# EAGLE board posboard (EAGLE 7.1.0)
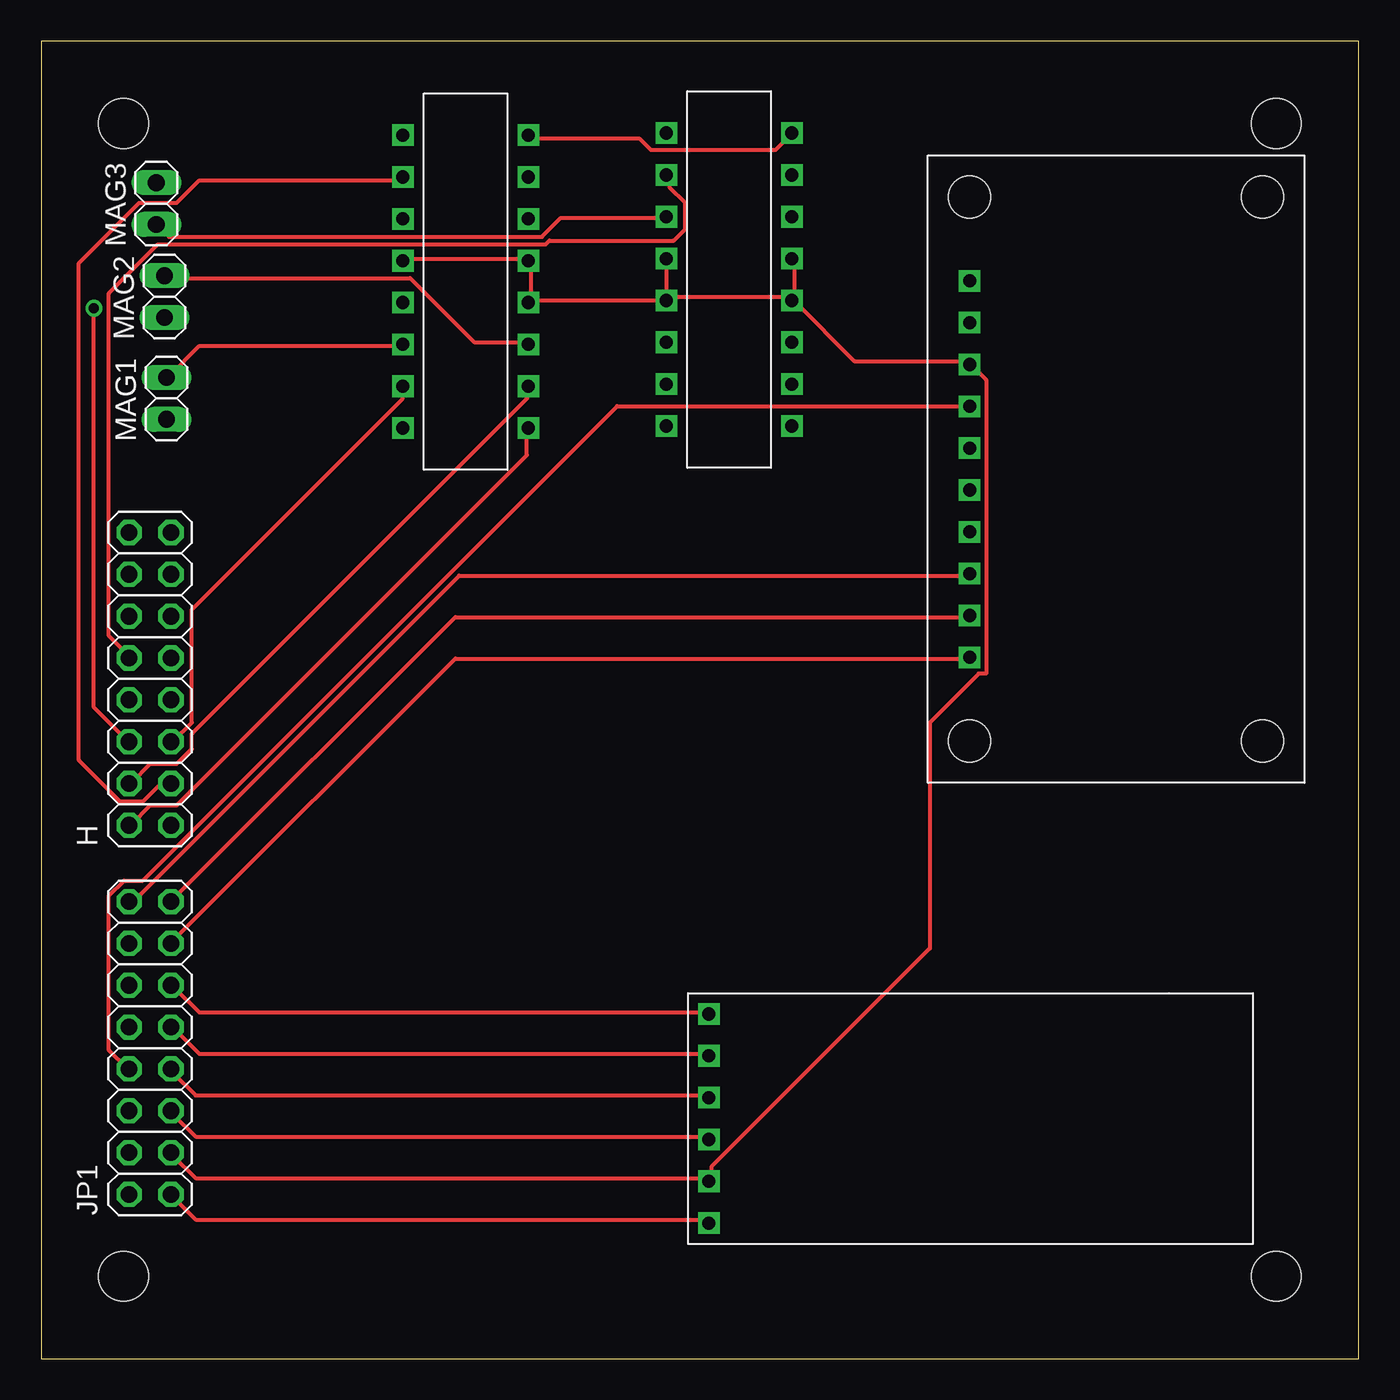
[diagram p0: board, top side]
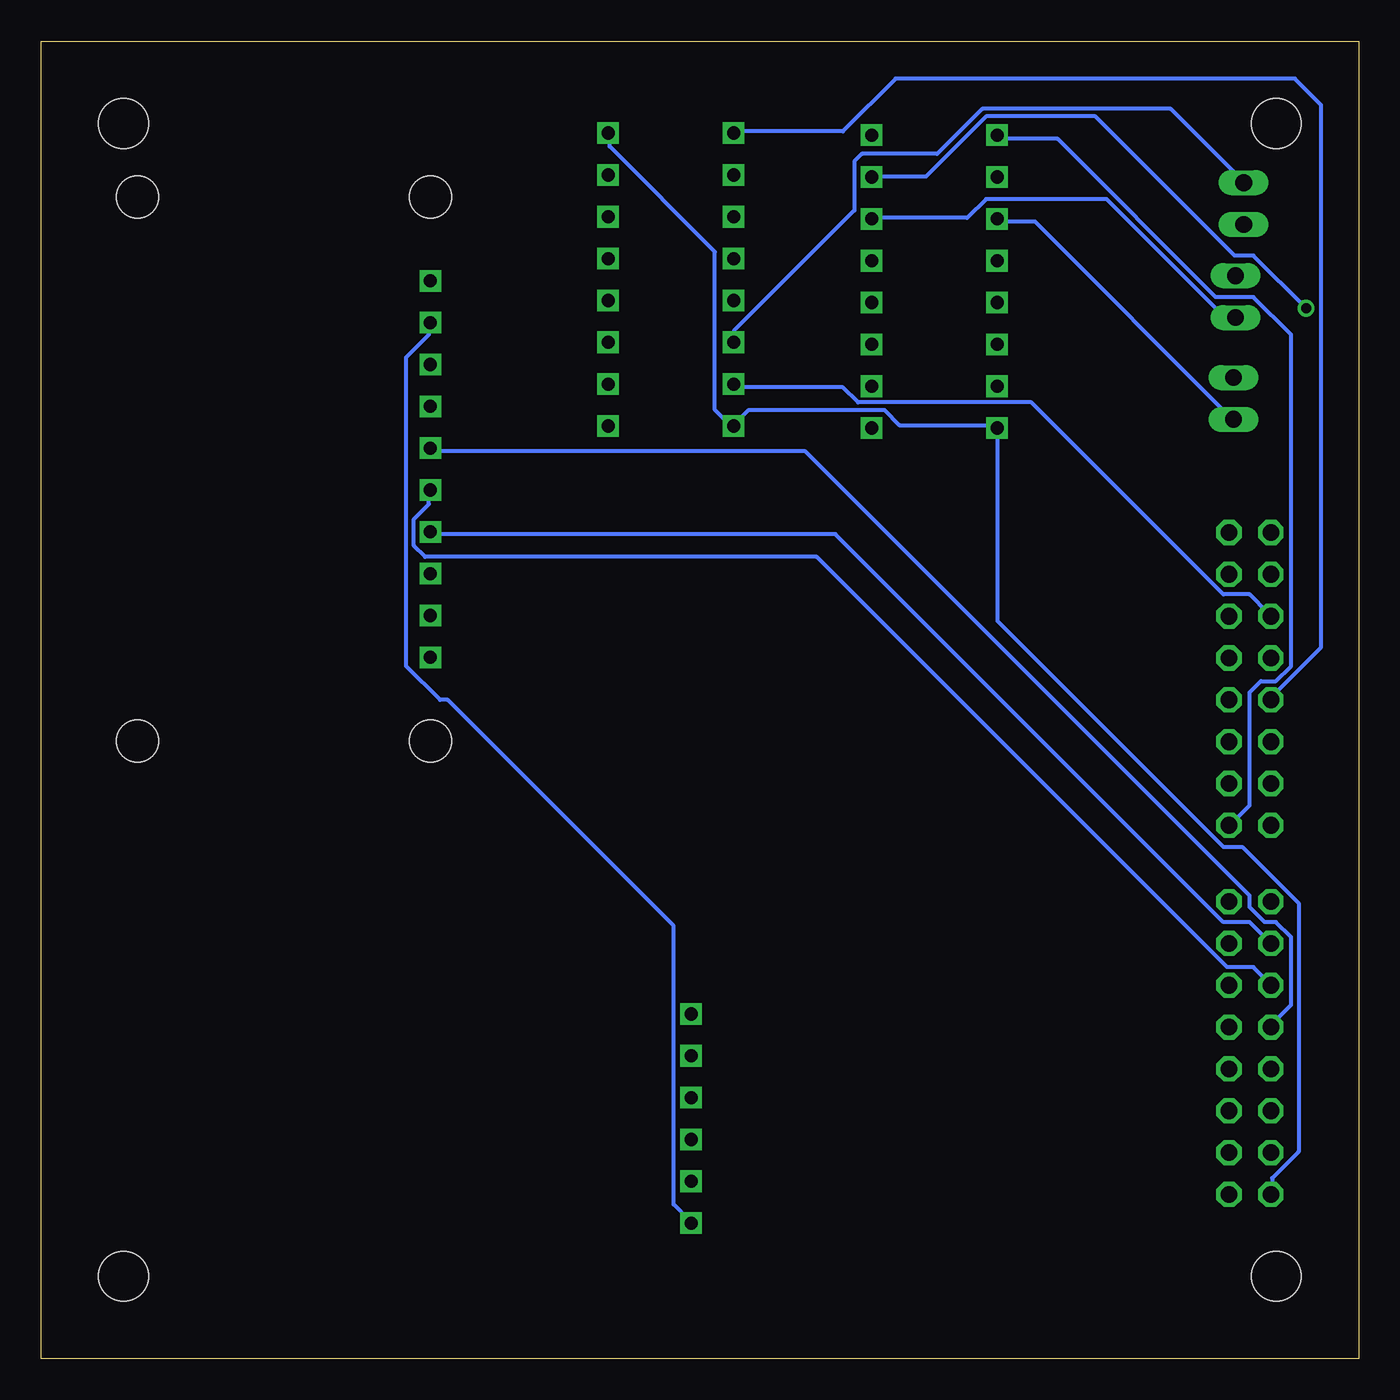
[diagram p1: board, bottom side, seen from below]

Size 80 x 80 mm. Coordinates in mm from the lower left corner, seen from the top.
Outline: 0,0 80,0 80,80 0,80 0,0
Copper layers (1*16): Top 0.035mm / dielectric 1.5mm / Bottom 0.035mm
Design rules "default": minimum track width 10mil, minimum drill 24mil, track to track 8mil, track to pad 8mil, pad to pad 8mil, via to via 8mil, smd to smd 8mil, copper to edge 40mil, drill to drill 8mil, minimum pad ring 10mil, minimum via ring 8mil, stop-mask expansion 4mil, vias tented up to drill 0mil, thermal gap 10mil
Holes 3 mm at 5,75 75,75 75,5 5,5

## Footprints (pad centres in the part's own frame; a part is rotated, then mirrored left to right if it is on the bottom)
2X08 = drill 1.016 octagon: 1 -8.89,-1.27; 2 -8.89,1.27; 3 -6.35,-1.27; 4 -6.35,1.27; 5 -3.81,-1.27; 6 -3.81,1.27; 7 -1.27,-1.27; 8 -1.27,1.27; 9 1.27,-1.27; 10 1.27,1.27; 11 3.81,-1.27; 12 3.81,1.27; 13 6.35,-1.27; 14 6.35,1.27; 15 8.89,-1.27; 16 8.89,1.27
1X02 = drill 1.016 long: 1 -1.27,0; 2 1.27,0
GPS = drill 0.8 square: 3.3V 15.24,1.27; GND 12.7,1.27; RX 10.16,1.27; SCL 5.08,1.27; SDA 2.54,1.27; TX 7.62,1.27
IMU = drill 0.8 square: 3V 10.16,2.54; 5V 7.62,2.54; GINT 20.32,2.54; GND 12.7,2.54; GRDY 22.86,2.54; LINT1 25.4,2.54; LINT2 27.94,2.54; LRDY 30.48,2.54; SCL 15.24,2.54; SDA 17.78,2.54 | hole 2.54: 2.54,2.54; 35.56,2.54; 2.54,20.32; 35.56,20.32
HBRIDGE = drill 0.8 square: 1A -3.81,-2.54; 1Y -1.27,-2.54; 2A 8.89,-2.54; 2Y 6.35,-2.54; 3A 8.89,5.08; 3Y 6.35,5.08; 4A -3.81,5.08; 4Y -1.27,5.08; 12EN -6.35,-2.54; 34EN 11.43,5.08; P$4 1.27,-2.54; P$5 3.81,-2.54; P$12 1.27,5.08; P$13 3.81,5.08; VCC1 -6.35,5.08; VCC2 11.43,-2.54

## Placement (x,y rotation side)
H  [2X08]  6.61,41.28 90 top
JP1  [2X08]  6.61,18.87 90 top
MAG1  [1X02]  7.61,58.31 90 top
MAG2  [1X02]  7.49,64.49 90 top
MAG3  [1X02]  6.99,70.14 90 top
U$1  GPS  [GPS]  39.27,23.48 270 top
U$2  IMU  [IMU]  53.83,73.07 270 top
U$3  HBRIDGE  [HBRIDGE]  24.5,67.94 270 top
U$4  HBRIDGE  [HBRIDGE]  40.5,68.07 270 top

## Library data of the parts
H JP1 MAG1-MAG3 = pinhead
U$1 = gps
U$2 = imu
U$3 U$4 = hbridge

## Nets
N$1: JP1.1 U$1.3.3V U$2.3V
N$2: JP1.3 U$1.GND U$2.GND U$3.P$4 U$3.P$12 U$3.P$13 U$4.P$4 U$4.P$5 U$4.P$12 U$4.P$13
N$3: JP1.5 U$1.RX
N$4: JP1.7 U$1.TX
N$5: JP1.9 U$1.SCL
N$6: JP1.11 U$1.SDA
N$7: H.1 U$3.12EN
N$8: JP1.13 U$2.LRDY
N$9: JP1.15 U$2.LINT2
N$10: JP1.16 U$2.LINT1
N$11: JP1.14 U$2.GRDY
N$12: JP1.12 U$2.GINT
N$13: JP1.10 U$2.SDA
N$14: JP1.8 U$2.SCL
N$15: H.3 U$3.1A
N$16: JP1.2 U$3.VCC1 U$3.VCC2 U$4.VCC1 U$4.VCC2
N$17: H.2 U$3.34EN
N$18: H.4 U$3.3A
N$19: H.5 U$3.2A
N$20: H.8 U$4.12EN
N$21: H.10 U$4.1A
N$22: H.6 U$3.4A
N$23: H.12 U$4.2A
N$24: MAG1.1 U$3.1Y
N$25: MAG1.2 U$3.2Y
N$26: MAG2.1 U$3.4Y
N$27: MAG2.2 U$3.3Y
N$28: MAG3.1 U$4.1Y
N$29: MAG3.2 U$4.2Y

## Tracks (layer width: path | path; a pad name or v marks a point on that pad's centre or on a via)
N$1
  Top 0.254: U$1.3.3V 40.46,8.46 9.37,8.46 8,9.83 JP1.1
  Bottom 0.254: U$2.3V 56.46,62.87 56.46,62.18 57.84,60.81 57.84,42.06 55.78,40.01 55.32,40.01 41.6,26.29 41.6,9.37 40.69,8.46 U$1.3.3V
N$2
  Top 0.254: JP1.3 8,12.34 9.37,10.97 40.46,10.97 U$1.GND 40.69,10.97 40.69,11.66 53.95,24.92 53.95,38.63 56.92,41.6 57.38,41.6 57.38,59.44 56.46,60.35 U$2.GND 56.24,60.58 49.38,60.58 45.72,64.24 U$4.P$13 | 29.72,64.24 29.72,66.52 U$3.P$12 29.49,66.75 22.17,66.75 U$3.P$4 | U$4.P$5 37.95,64.47 37.95,66.75 U$4.P$4 | U$4.P$13 45.72,64.47 45.72,66.75 U$4.P$12 | U$4.P$5 38.18,64.47 45.49,64.47 U$4.P$13 | 29.72,64.24 37.95,64.24 U$4.P$5 | 29.72,64.24 U$3.P$13
N$3
  Top 0.254: U$1.RX 40.46,13.49 9.37,13.49 8,14.86 JP1.5
N$4
  Top 0.254: U$1.TX 40.46,16 9.37,16 8,17.37 JP1.7
N$5
  Top 0.254: U$1.SCL 40.46,18.52 9.6,18.52 8,20.12 JP1.9
N$6
  Top 0.254: U$1.SDA 40.46,21.03 9.6,21.03 8,22.63 JP1.11
N$7
  Bottom 0.254: U$3.12EN 21.95,74.07 18.29,74.07 8.69,64.47 6.4,64.47 4.12,62.18 4.12,42.06 5.03,41.15 5.94,41.15 6.63,40.46 6.63,33.6 7.77,32.46 H.1
N$8
  Top 0.254: U$2.LRDY 56.24,42.52 25.15,42.52 8,25.38 JP1.13
N$9
  Top 0.254: U$2.LINT2 56.24,45.03 25.15,45.03 8,27.89 JP1.15
N$10
  Top 0.254: U$2.LINT1 56.24,47.55 25.38,47.55 5.49,27.66 JP1.16
N$11
  Bottom 0.254: U$2.GRDY 56.24,50.06 31.77,50.06 8.23,26.52 6.63,26.52 5.49,25.38 JP1.14
N$12
  Bottom 0.254: U$2.GINT 56.46,52.58 56.46,51.89 57.38,50.98 57.38,49.38 56.69,48.69 32.92,48.69 8,23.77 6.4,23.77 5.49,22.86 JP1.12
N$13
  Bottom 0.254: U$2.SDA 56.24,55.09 33.6,55.09 6.63,28.12 6.63,27.43 5.71,26.52 5.03,26.52 4.12,25.6 4.12,21.49 5.26,20.34 JP1.10
N$14
  Top 0.254: U$2.SCL 56.24,57.84 34.98,57.84 6.17,29.03 5.03,29.03 4.12,28.12 4.12,18.75 5.26,17.6 JP1.8
N$15
  Top 0.254: U$3.1A 21.95,71.55 9.6,71.55 8.23,70.18 5.94,70.18 2.29,66.52 2.29,36.35 4.8,33.83 6.17,33.83 7.09,34.75 7.77,34.75 H.3
N$16
  Top 0.254: U$3.VCC1 29.72,74.07 36.35,74.07 37.03,73.38 44.58,73.38 45.49,74.3 U$4.VCC1
  Bottom 0.254: JP1.2 5.26,10.06 5.26,10.97 3.66,12.57 3.66,27.66 7.09,31.09 8.23,31.09 21.95,44.81 21.95,56.46 U$3.VCC2 22.17,56.69 27.89,56.69 28.8,57.61 37.03,57.61 37.95,56.69 U$4.VCC2 38.18,56.69 39.09,57.61 39.09,67.21 45.49,73.61 45.49,74.3 U$4.VCC1
N$17
  Top 0.254: U$3.34EN 29.49,56.46 29.49,54.86 8.23,33.6 6.63,33.6 5.49,32.46 H.2
N$18
  Top 0.254: U$3.3A 29.49,58.98 29.49,58.29 9.14,37.95 9.14,37.03 8.23,36.12 6.63,36.12 5.49,34.98 H.4
N$19
  Top 0.254: U$3.2A 21.95,58.98 21.95,58.29 9.14,45.49 9.14,38.63 8,37.49 H.5
N$20
  Bottom 0.254: U$4.12EN 37.95,74.52 31.32,74.52 28.12,77.72 3.89,77.72 2.29,76.12 2.29,43.2 5.26,40.23 H.8
N$21
  Top 0.254: U$4.1A 38.18,71.78 38.18,71.09 39.09,70.18 39.09,68.58 38.41,67.89 30.86,67.89 30.63,67.67 7.09,67.67 4.12,64.69 4.12,43.89 5.26,42.75 H.10
N$22  (via drill 0.61)
  Top 0.254: v3.2,63.78 3.2,39.55 5.26,37.49 H.6
  Bottom 0.254: v3.2,63.78 6.4,66.98 7.54,66.98 16,75.44 22.63,75.44 26.29,71.78 29.49,71.78 U$3.4A
N$23
  Bottom 0.254: U$4.2A 37.95,58.98 31.32,58.98 30.4,58.06 19.89,58.06 8.23,46.41 6.63,46.41 5.49,45.26 H.12
N$24
  Bottom 0.254: U$3.1Y 21.95,69.04 19.66,69.04 7.77,57.15 MAG1.1
N$25
  Top 0.254: U$3.2Y 21.95,61.49 9.6,61.49 7.77,59.66 MAG1.2
N$26
  Bottom 0.254: U$3.4Y 29.49,69.27 23.77,69.27 22.63,70.41 15.32,70.41 8.23,63.32 7.54,63.32 MAG2.1
N$27
  Top 0.254: U$3.3Y 29.49,61.72 26.29,61.72 22.4,65.61 7.54,65.61 MAG2.2
N$28
  Top 0.254: U$4.1Y 37.95,69.27 31.55,69.27 30.4,68.12 7.77,68.12 7.09,68.81 MAG3.1
N$29
  Bottom 0.254: U$4.2Y 37.95,61.72 37.95,62.41 30.63,69.72 30.63,72.69 30.18,73.15 25.6,73.15 22.86,75.89 11.43,75.89 7.09,71.55 MAG3.2